# EAGLE board NSE2022_GPSDOWNLINK_ver0 (EAGLE 9.6.0)
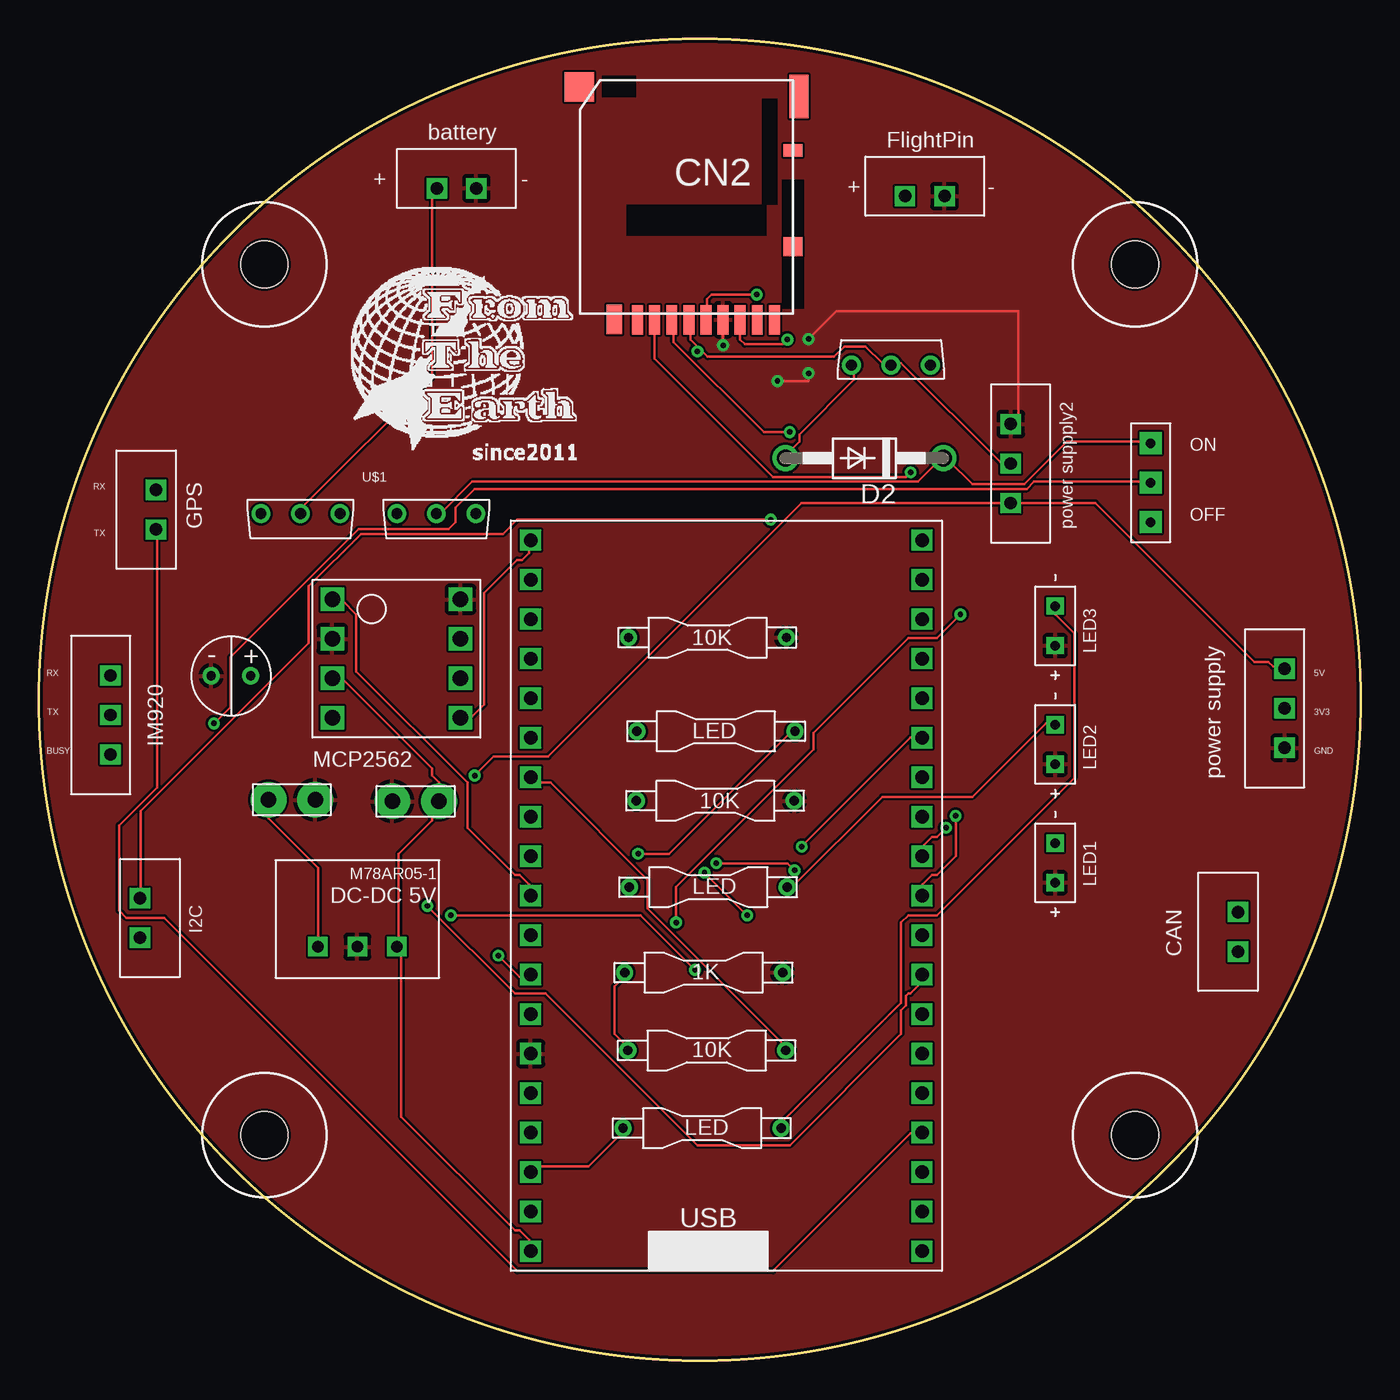
[diagram p0: board, top side]
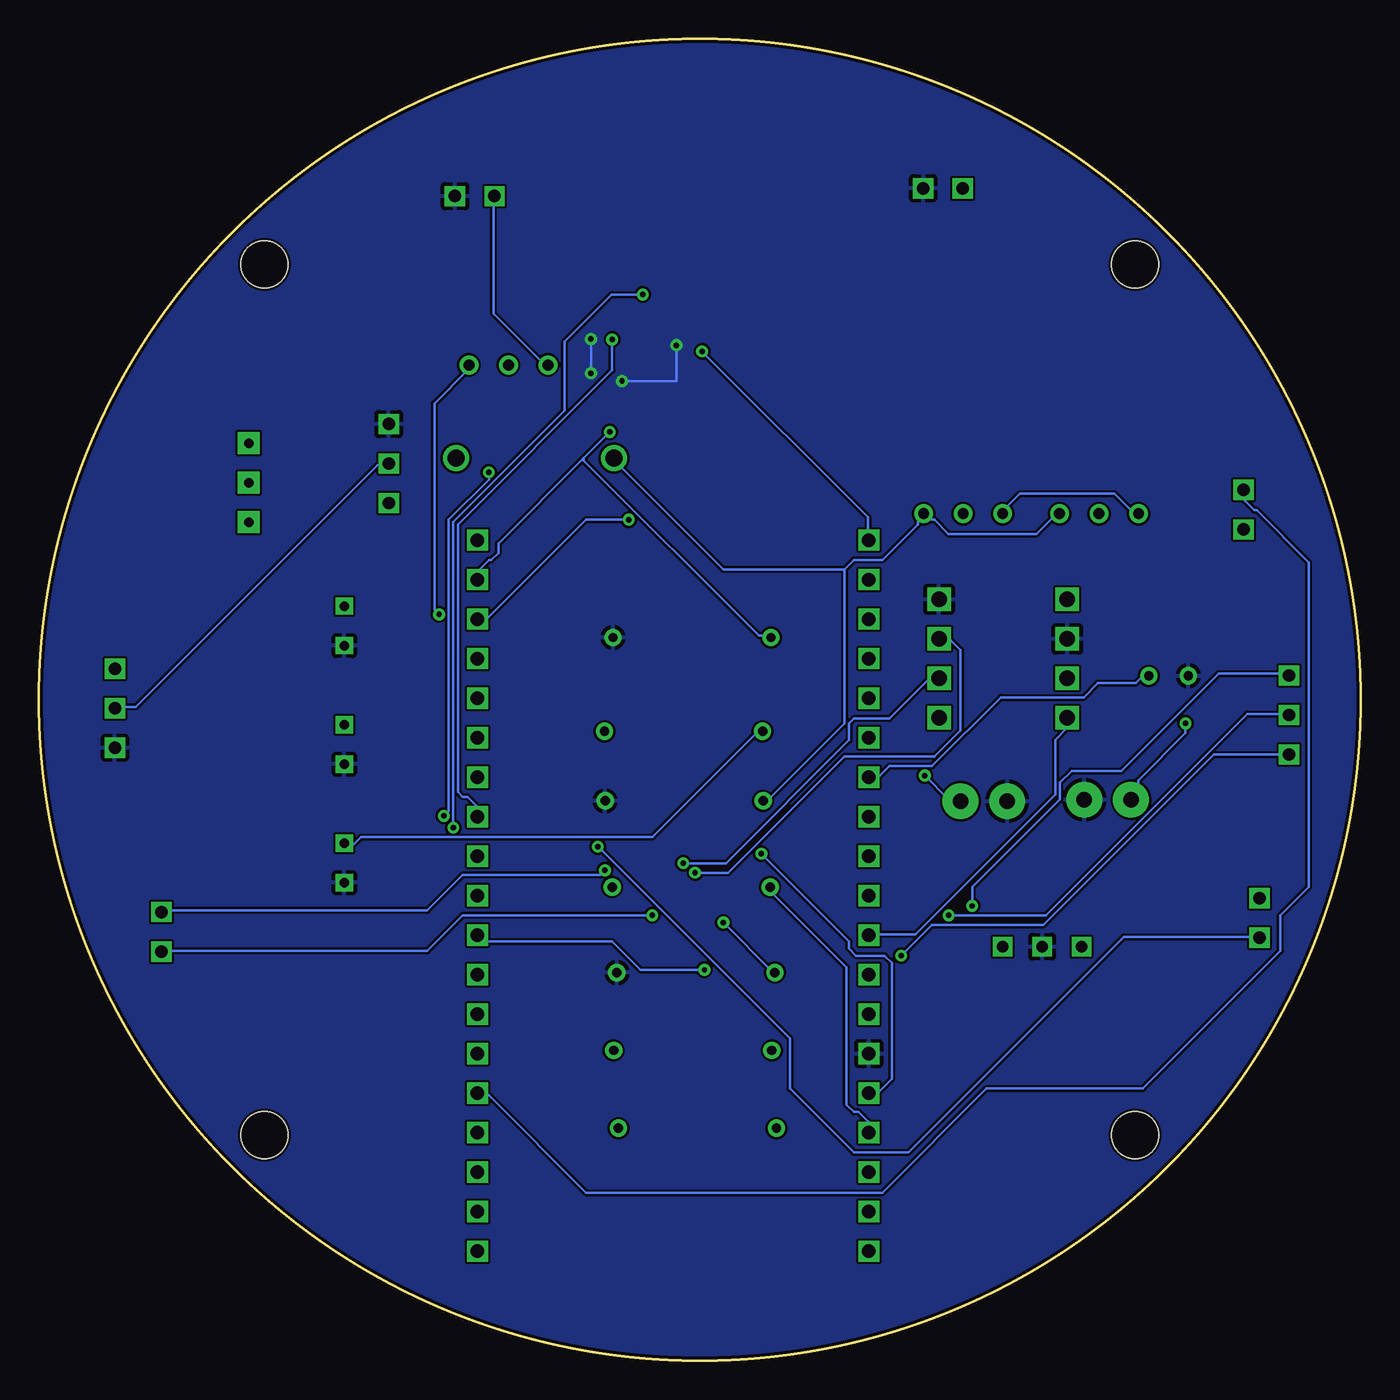
[diagram p1: board, bottom side, seen from below]

Size 85.01 x 85.01 mm. Coordinates in mm from the lower left corner, seen from the top.
Outline: circle at 42.5,42.5 radius 42.5
Copper layers (1*16): Top 0.035mm / dielectric 1.5mm / Bottom 0.035mm
Design rules "PCBGoGo": minimum track width 6mil, minimum drill 0.2mm, track to track 6mil, track to pad 6mil, pad to pad 6mil, via to via 6mil, smd to smd 6mil, copper to edge 0.2mm, drill to drill 6mil, minimum pad ring 10mil, minimum via ring 8mil, stop-mask expansion 4mil, vias tented up to drill 0mil, thermal gap 10mil
Holes 3 mm at 70.5,70.5 14.5,70.5 14.5,14.5 70.5,14.5

## Footprints (pad centres in the part's own frame; a part is rotated, then mirrored left to right if it is on the bottom)
REGISTER = drill 0.6: A -5.08,0; B 5.08,0
CAPACITOR-ELECTROLYTIC_1 = drill 0.6: AN -1.27,0; KS 1.27,0
CERAMIC_CAPACITOR = drill 1 pad 2.3: P$1 0,0; P$2 0,3
DM3AT = smd 0.7 x 1.9: CD/DAT3 2.2,6.4; CLK -1.1,6.4; CMD 1.1,6.4; DAT0 -3.3,6.4; DAT1 -4.4,6.4; DAT2 3.3,6.4; DET_B -5.5,6.4; VDD 0,6.4; VSS -2.2,6.4 | smd 1.2 x 0.8: DET_A -6.7,-4.5 | smd 1 x 1.9: P$9 4.8,6.381 | smd 1.2 x 1.2: P$11 -6.7,1.7 | smd 1.2 x 2.8: P$13 -7.081,-7.973 | smd 1.9 x 1.9: P$14 7.054,-8.562
DO41-10 = drill 1.118: A 5.08,0; C -5.08,0
2PIN = drill 0.8 square: PIN1 1.27,0; PIN2 3.81,0
2SJ681 = drill 0.7: DRAIN 0,0; GATE 2.54,0; SOURCE -2.54,0
3PIN = drill 0.8 square: PIN1 1.27,0; PIN2 3.81,0; PIN3 6.35,0
M78AR05-1 = drill 0.75 pad 1.27 square: GND 0,0; VIN 2.54,0; VOUT -2.54,0
2SK4017 = drill 0.7: DRAIN 0,0; GATE 2.54,0; SOURCE -2.54,0
SLIDESWITCH = drill 0.6 pad 1.422 square: A 0,0; B 5.08,0; C 2.54,0
ESP32 = drill 0.85 square: 3.3V 1.27,46.99; 5V 1.27,1.27; EN 1.27,44.45; GND1 1.27,13.97; GND2 26.44,46.99; GND3 26.44,31.75; GPIO0 26.44,13.97; GPIO2 26.44,11.43; GPIO4 26.44,16.51; GPIO5 26.44,24.13; GPIO6 26.44,1.27; GPIO7 26.44,3.81; GPIO8 26.44,6.35; GPIO9 1.27,8.89; GPIO10 1.27,6.35; GPIO11 1.27,3.81; GPIO12 1.27,16.51; GPIO13 1.27,11.43; GPIO14 1.27,19.05; GPIO15 26.44,8.89; GPIO16 26.44,19.05; GPIO17 26.44,21.59; GPIO18 26.44,26.67; GPIO19 26.44,29.21; GPIO21 26.44,34.29; GPIO22 26.44,41.91; GPIO23 26.44,44.45; GPIO25 1.27,26.67; GPIO26 1.27,24.13; GPIO27 1.27,21.59; GPIO32 1.27,31.75; GPIO33 1.27,29.21; GPIO34 1.27,36.83; GPIO35 1.27,34.29; GPIO36 1.27,41.91; GPIO39 1.27,39.37; RX 26.44,36.83; TX 26.44,39.37
MCP2562 = drill 1 square: CANH 8.255,6.35; CANL 8.255,3.81; RXD 0,1.27; STBY 8.255,8.89; TXD 0,8.89; VDD 0,3.81; VIO 8.255,1.27; VSS 0,6.35
LED = drill 0.6 square: MINUS 1.27,0; PLUS 3.81,0

## Placement (x,y rotation side)
10K  10K  [REGISTER]  43,46.5 180 top
C3  [CAPACITOR-ELECTROLYTIC_1]  12.35,44.04 0 top
CERAMIC_CAPACITOR1  CERAMIC_CAPACITOR  [CERAMIC_CAPACITOR]  25.73,35.97 90 top
CERAMIC_CAPACITOR2  CERAMIC_CAPACITOR  [CERAMIC_CAPACITOR]  14.77,36.07 270 top
CN2  DM3AT  [DM3AT]  41.8,73.34 180 top
D2  1N4004  [DO41-10]  53.09,58.04 180 top
R1  [REGISTER]  43.54,40.47 0 top
R2  [REGISTER]  43.05,30.45 180 top
R3  [REGISTER]  43.5,36 180 top
R7  [REGISTER]  42.75,24.95 180 top
R8  [REGISTER]  42.95,19.95 180 top
R16  [REGISTER]  42.65,14.95 180 top
U$1  F.T.E.LOGO  [LOGO]  19.5,56.5 0 top
U$2  2PIN  [2PIN]  6.5,31 270 top
U$3  2SJ681-PCH  [2SJ681]  25.56,54.47 0 top
U$4  3PIN  [3PIN]  62.5,61.5 270 top
U$5  2SJ681-PCH  [2SJ681]  16.82,54.47 0 top
U$6  M78AR05-1  [M78AR05-1]  20.48,26.62 180 top
U$7  2SK4017-NCH  [2SK4017]  54.8,64.03 180 top
U$8  SLIDESWITCH  [SLIDESWITCH]  71.5,59 270 top
U$22  2PIN  [2PIN]  24.32,75.39 0 top
U$23  2PIN  [2PIN]  54.43,74.89 0 top
U$24  2PIN  [2PIN]  77.11,25.04 90 top
U$26  ESP32  [ESP32]  30.36,5.77 0 top
U$28  [MCP2562]  18.86,40.07 0 top
U$29  2PIN  [2PIN]  7.53,52.18 90 top
U$46  3PIN  [3PIN]  80.11,38.14 90 top
U$49  3PIN  [3PIN]  4.61,37.71 90 top
U$55  LED  [LED]  65.36,34.55 270 top
U$70  LED  [LED]  65.36,42.17 270 top
U$71  LED  [LED]  65.36,49.79 270 top

## Library data of the parts
10K R1-R3 R7 R16 = normal register; R: 10k
C3 = normal capacitor; F: 10uF
CERAMIC_CAPACITOR1 CERAMIC_CAPACITOR2 = capacitor
CN2 = microSD
D2 = diode
R8 = normal register; R: 1k
U$1 = logo
U$2 U$22-U$24 U$29 = 2PIN
U$3 U$5 U$7 = MOSFET
U$4 U$46 U$49 = 3PIN
U$6 = M78AR05-1
U$8 = SLIDESWITCH
U$26 = ESP32
U$28 = MCP2562
U$55 U$70 U$71 = LEDkato

## Nets
+3V3: CN2.VDD U$4.PIN2 U$7.DRAIN U$26.3.3V U$28.VIO U$46.PIN2
+5V: CERAMIC_CAPACITOR1.P$1 U$4.PIN3 U$6.VOUT U$26.5V U$28.VDD U$46.PIN3
BATTE_GD: U$5.DRAIN U$22.PIN1
CANH2: U$26.GPIO27 U$28.RXD
CANH2OUT: U$24.PIN1 U$28.CANH
CANL2: U$26.GPIO26 U$28.TXD
CANL2OUT: U$24.PIN2 U$28.CANL
FLIGHTPIN: C3.KS R8.A U$26.GPIO32
FP: D2.A R3.B U$3.GATE U$5.GATE U$7.GATE U$23.PIN1
GND: 10K.A C3.AN CERAMIC_CAPACITOR1.P$2 CERAMIC_CAPACITOR2.P$2 CN2.VSS R3.A R7.A U$4.PIN1 U$6.GND U$22.PIN2 U$23.PIN2 U$26.GND1 U$28.STBY U$28.VSS U$46.PIN1 U$55.PLUS U$70.PLUS U$71.PLUS
GPSRX: U$26.GPIO2 U$29.PIN2
GPSTX: U$26.GPIO15 U$29.PIN1
IMBUSY: U$26.GPIO14 U$49.PIN1
IMRX: U$26.GPIO16 U$49.PIN3
IMTX: U$26.GPIO17 U$49.PIN2
LED1: R1.B U$26.GPIO13
LED2: R2.B U$26.GPIO9
LED3: R16.B U$26.GPIO10
MISO: CN2.DAT0 U$26.GPIO19
MOSI: 10K.B CN2.CMD U$26.GPIO23
N$1: U$26.GND2
N$3: U$3.SOURCE U$5.SOURCE
N$4: CERAMIC_CAPACITOR2.P$1 U$6.VIN U$8.C
N$9: R7.B R8.B U$7.SOURCE
N$12: D2.C U$3.DRAIN U$8.A
N$14: R1.A U$55.MINUS
N$18: R2.A U$70.MINUS
N$19: R16.A U$71.MINUS
OFFPIN: U$26.GPIO12
SCK: CN2.CLK U$26.GPIO18
SCL: U$2.PIN1 U$26.GPIO22
SDA: U$2.PIN2 U$26.GPIO21
SS: CN2.CD/DAT3 U$26.GPIO5

## Tracks (layer width: path | path; a pad name or v marks a point on that pad's centre or on a via)
+3V3  (via drill 0.35)
  Top 0.152: U$26.3.3V 31.53,52.71 31.53,51.95 31.07,51.49 30.77,51.49 28.63,49.36 28.63,42.2 27.87,41.44 27.26,41.44 U$28.VIO | 42.5,65.06 43,64.56 51.15,64.56 51.8,65.21 53.17,65.21 54.24,64.14 54.69,64.14 U$7.DRAIN 54.85,64.14 55.46,64.14 61.86,57.74 62.47,57.74 U$4.PIN2 | 42.5,65.06 41.89,65.67 41.89,66.89 CN2.VDD | 42.5,65.06 v42.35,64.91
  Bottom 0.152: U$46.PIN2 79.99,42.05 78.77,42.05 63.23,57.59 62.62,57.59 U$4.PIN2 | v42.35,64.91 31.68,54.24 31.68,52.87 U$26.3.3V
+5V  (via drill 0.35)
  Top 0.152: U$46.PIN3 79.99,44.64 79.38,44.64 79.08,44.94 78.16,44.94 67.95,55.15 62.62,55.15 U$4.PIN3 62.47,55.15 49.06,55.15 32.75,38.84 29.24,38.84 v28.02,37.63 | U$26.5V 31.53,7.15 31.53,7.76 30.92,8.36 30.62,8.36 23.3,15.68 23.3,26.35 23.15,26.5 U$6.VOUT 23.15,26.65 23.15,32.6 25.28,34.73 25.28,35.64 25.59,35.95 CERAMIC_CAPACITOR1.P$1 25.74,36.1 25.74,37.17 25.28,37.63 25.28,38.08 19.49,43.87 18.88,43.87 U$28.VDD
  Bottom 0.152: v28.02,37.63 26.5,36.1 25.74,36.1 CERAMIC_CAPACITOR1.P$1
BATTE_GD
  Top 0.152: U$5.DRAIN 16.9,54.54 16.9,54.85 25.28,63.23 25.28,74.96 25.59,75.27 U$22.PIN1
CANH2
  Bottom 0.152: U$26.GPIO27 31.53,27.41 28.63,27.41 19.64,36.41 19.64,39.91 18.88,40.67 18.88,41.28 U$28.RXD
CANH2OUT  (via drill 0.35)
  Top 0.152: v42.81,31.38 v45.55,28.63
  Bottom 0.152: v45.55,28.63 57.74,28.63 60.03,26.35 77.1,26.35 U$24.PIN1 | v42.81,31.38 40.67,31.38 33.21,38.84 27.41,38.84 25.74,40.52 25.74,45.7 26.35,46.31 27.11,46.31 U$28.CANH
CANL2
  Top 0.152: U$26.GPIO26 31.53,30.01 31.53,30.62 30.92,31.22 30.62,31.22 27.57,34.27 27.57,37.17 20.4,44.33 20.4,47.99 19.49,48.9 18.88,48.9 U$28.TXD
CANL2OUT  (via drill 0.35)
  Top 0.152: v48.6,31.53 48.14,31.99 v43.57,31.99
  Bottom 0.152: v48.6,31.53 48.9,31.22 57.74,31.22 60.03,28.94 77.1,28.94 U$24.PIN2 | v43.57,31.99 40.83,31.99 32.9,39.91 32.9,40.98 32.6,41.28 30.31,41.28 27.72,43.87 27.26,43.87 U$28.CANL
FLIGHTPIN
  Top 0.152: R8.A 47.99,20.1 47.99,20.25 39.15,29.09 39.15,30.92 32.9,37.17 31.99,37.17 31.68,37.47 U$26.GPIO32
  Bottom 0.152: C3.KS 13.7,44.03 14,44.03 14.46,43.57 16.9,43.57 17.81,42.65 23.15,42.65 27.57,38.24 30.31,38.24 30.92,37.63 31.53,37.63 U$26.GPIO32
FP
  Top 0.152: U$7.GATE 52.41,63.99 52.41,63.08 48.9,59.57 48.9,59.11 48.14,58.35 48.14,58.05 D2.A
  Bottom 0.152: U$23.PIN1 55.76,74.81 55.76,67.34 52.41,63.99 U$7.GATE | 33.21,50.88 33.21,40.98 38.08,36.1 38.39,36.1 R3.B | 33.21,50.88 32.6,51.49 30.77,51.49 28.48,53.78 28.48,53.93 28.02,54.39 U$3.GATE 28.02,54.54 27.57,54.08 27.41,54.08 26.5,53.17 20.86,53.17 19.64,54.39 19.49,54.39 U$5.GATE | 33.21,50.88 40.98,50.88 47.99,57.89 D2.A
GND  (via drill 0.35)
  Top 0.152: CN2.VSS v44,65.3 | v47.5,63 49.5,63 v49.5,63.5 | v49.5,65.7 51.3,67.5 63,67.5 63,60.73 U$4.PIN1
  Bottom 0.152: v44,65.3 44,63 v47.5,63 | v49.5,63.5 v49.5,65.7
  pour Top: -7.5,86 92,86 92,-3.5 -7.5,-3.5
  pour Bottom: 95,88.5 95,86.5 95,-5 -10,-5 -10,88
GPSRX
  Bottom 0.152: U$29.PIN2 7.45,55.91 7.45,55.3 6.84,54.69 6.69,54.69 3.34,51.34 3.34,30.46 5.16,28.63 5.16,26.35 14,17.51 24.06,17.51 30.77,10.8 49.82,10.8 56.07,17.05 56.68,17.05 U$26.GPIO2
GPSTX
  Top 0.152: U$29.PIN1 7.6,53.32 7.6,36.86 5.16,34.43 5.16,28.94 5.62,28.48 8.06,28.48 30.77,5.77 47.23,5.77 56.07,14.61 56.68,14.61 U$26.GPIO15
IMBUSY  (via drill 0.35)
  Top 0.152: v29.55,26.04 30.92,24.67 31.53,24.67 U$26.GPIO14
  Bottom 0.152: v29.55,26.04 27.57,28.02 20.4,28.02 9.43,39 4.71,39 U$49.PIN1
IMRX  (via drill 0.35)
  Top 0.152: v24.98,29.24 30.62,23.6 32.6,23.6 42.35,13.85 48.29,13.85 55.46,21.01 55.46,22.54 55.76,22.84 55.76,23.45 55.91,23.6 56.07,23.6 56.68,24.21 56.68,24.67 U$26.GPIO16
  Bottom 0.152: v24.98,29.24 24.98,30.46 19.34,36.1 19.34,37.17 18.58,37.93 15.38,37.93 9.13,44.18 4.71,44.18 U$49.PIN3
IMTX  (via drill 0.35)
  Top 0.152: v26.5,28.63 38.69,28.63 v42.2,25.13
  Bottom 0.152: v26.5,28.63 20.25,28.63 7.3,41.59 4.71,41.59 U$49.PIN2 | v42.2,25.13 46.31,25.13 48.14,26.96 56.37,26.96 56.68,27.26 U$26.GPIO17
LED1  (via drill 0.35)
  Top 0.152: v38.54,32.6 40.52,32.6 48.29,40.37 48.6,40.37 R1.B
  Bottom 0.152: v38.54,32.6 32.9,26.96 32.9,26.5 32.44,26.04 30.62,26.04 30.16,25.59 30.16,18.12 31.07,17.2 31.53,17.2 U$26.GPIO13
LED2
  Bottom 0.152: R2.B 37.93,30.31 37.93,30.16 33.05,25.28 33.05,16.44 32.6,15.98 32.29,15.98 31.68,15.38 31.68,14.77 U$26.GPIO9
LED3
  Top 0.152: R16.B 37.47,14.92 37.47,14.61 35.34,12.48 31.99,12.48 31.68,12.17 U$26.GPIO10
MISO  (via drill 0.35)
  Top 0.152: v48.14,65.67 47.84,65.36 45.4,65.36 45.09,65.67 45.09,66.89 CN2.DAT0
  Bottom 0.152: v48.14,65.67 48.14,63.69 58.05,53.78 58.05,36.56 57.74,36.25 57.44,36.25 56.83,35.64 56.83,35.03 U$26.GPIO19
MOSI  (via drill 0.35)
  Top 0.152: v48.29,59.72 46.62,59.72 40.83,65.51 40.83,66.89 CN2.CMD
  Bottom 0.152: 49.97,58.05 55.46,52.56 55.46,51.95 55.91,51.49 56.07,51.49 56.68,50.88 56.68,50.27 U$26.GPIO23 | 49.97,58.05 v48.29,59.72 | 49.97,58.05 49.97,57.89 38.69,46.62 37.93,46.62 10K.B
N$3
  Bottom 0.152: U$5.SOURCE 14.31,54.54 14.61,54.54 15.83,55.76 21.93,55.76 23.15,54.54 U$3.SOURCE
N$4  (via drill 0.35)
  Top 0.152: U$6.VIN 17.97,26.65 17.97,31.68 14.77,34.88 14.77,35.95 CERAMIC_CAPACITOR2.P$1 | v11.26,40.98 12.33,42.05 12.33,45.25 20.56,53.48 26.35,53.48 26.81,53.93 26.81,54.85 28.02,56.07 63.53,56.07 63.99,56.52 71.46,56.52 U$8.C
  Bottom 0.152: v11.26,40.98 11.26,40.37 14.31,37.32 14.31,36.56 14.77,36.1 CERAMIC_CAPACITOR2.P$1
N$9  (via drill 0.35)
  Top 0.152: R7.B 37.63,24.82 37.63,24.67 37.02,24.06 37.02,21.01 37.93,20.1 R8.B | v59.27,47.99 57.74,46.46 55.91,46.46 49.82,40.37 49.82,39.3 40.98,30.46 v40.98,28.18
  Bottom 0.152: v59.27,47.99 59.57,48.29 59.57,61.55 57.44,63.69 57.44,63.99 U$7.SOURCE | v40.98,28.18 37.78,24.98 R7.B
N$12
  Top 0.152: U$3.DRAIN 25.59,54.54 25.89,54.54 27.87,56.52 56.52,56.52 58.05,58.05 D2.C 58.2,57.89 58.5,57.89 60.03,56.37 63.38,56.37 66.12,59.11 71.46,59.11 U$8.A
N$14
  Bottom 0.152: R1.A 38.54,40.37 38.84,40.37 45.55,33.66 64.3,33.66 64.75,33.21 65.36,33.21 U$55.MINUS
N$18
  Top 0.152: R2.A 48.45,30.46 54.24,36.25 60.03,36.25 64.75,40.98 65.36,40.98 U$70.MINUS
N$19
  Top 0.152: U$71.MINUS 65.36,47.99 66.58,46.77 66.58,37.47 57.74,28.63 55.91,28.63 55.46,28.18 55.46,23 47.84,15.38 47.84,15.07 R16.A
SCK  (via drill 0.35)
  Top 0.152: v46.16,68.56 43.26,68.56 42.96,68.26 42.96,67.04 CN2.CLK | v58.35,34.27 57.74,33.66 57.44,33.66 56.83,33.05 56.83,32.44 U$26.GPIO18
  Bottom 0.152: v46.16,68.56 48.16,68.56 51.19,65.53 51.19,61.1 58.35,53.93 v58.35,34.27
SCL  (via drill 0.35)
  Top 0.152: v47.07,54.08 30.77,54.08 29.85,53.17 20.71,53.17 17.36,49.82 17.36,46.16 6.54,35.34 6.54,29.85 U$2.PIN1
  Bottom 0.152: v47.07,54.08 49.82,54.08 56.22,47.68 56.68,47.68 U$26.GPIO22
SDA  (via drill 0.35)
  Top 0.152: v49.06,33.05 56.07,40.06 56.68,40.06 U$26.GPIO21
  Bottom 0.152: v49.06,33.05 36.71,20.71 36.71,17.51 32.6,13.39 29.09,13.39 15.22,27.26 6.54,27.26 U$2.PIN2
SS  (via drill 0.35)
  Top 0.152: v56.07,57.13 55.76,56.83 47.23,56.83 39.61,64.45 39.61,66.89 CN2.CD/DAT3 | v58.96,35.03 58.96,32.44 57.74,31.22 57.44,31.22 56.83,30.62 56.83,30.01 U$26.GPIO5
  Bottom 0.152: v56.07,57.13 56.07,56.68 58.66,54.08 58.66,35.34 v58.96,35.03

## Text on the board
tPlace: battery | FlightPin | + | - | + | - | ON | RX | OFF | GPS | power suppply2 | TX | 10K | power supply | LED3 | RX | 5V | TX | 3V3 | LED | IM920 | BUSY | LED2 | GND | 10K | LED | LED1 | I2C | CAN | 1K | 10K | LED